# Altium PCB Electrode_Breakout.PcbDoc
Units mil, origin at the board's own origin, x right, y up, seen from the top; angles counter-clockwise.
Board outline 1600 x 1400 mil, 4 copper layers (Top, Ground Plane, Power Plane, Bottom), stack 61.497 mil thick; 7 components, 65 nets, 141 pads, 8 vias.
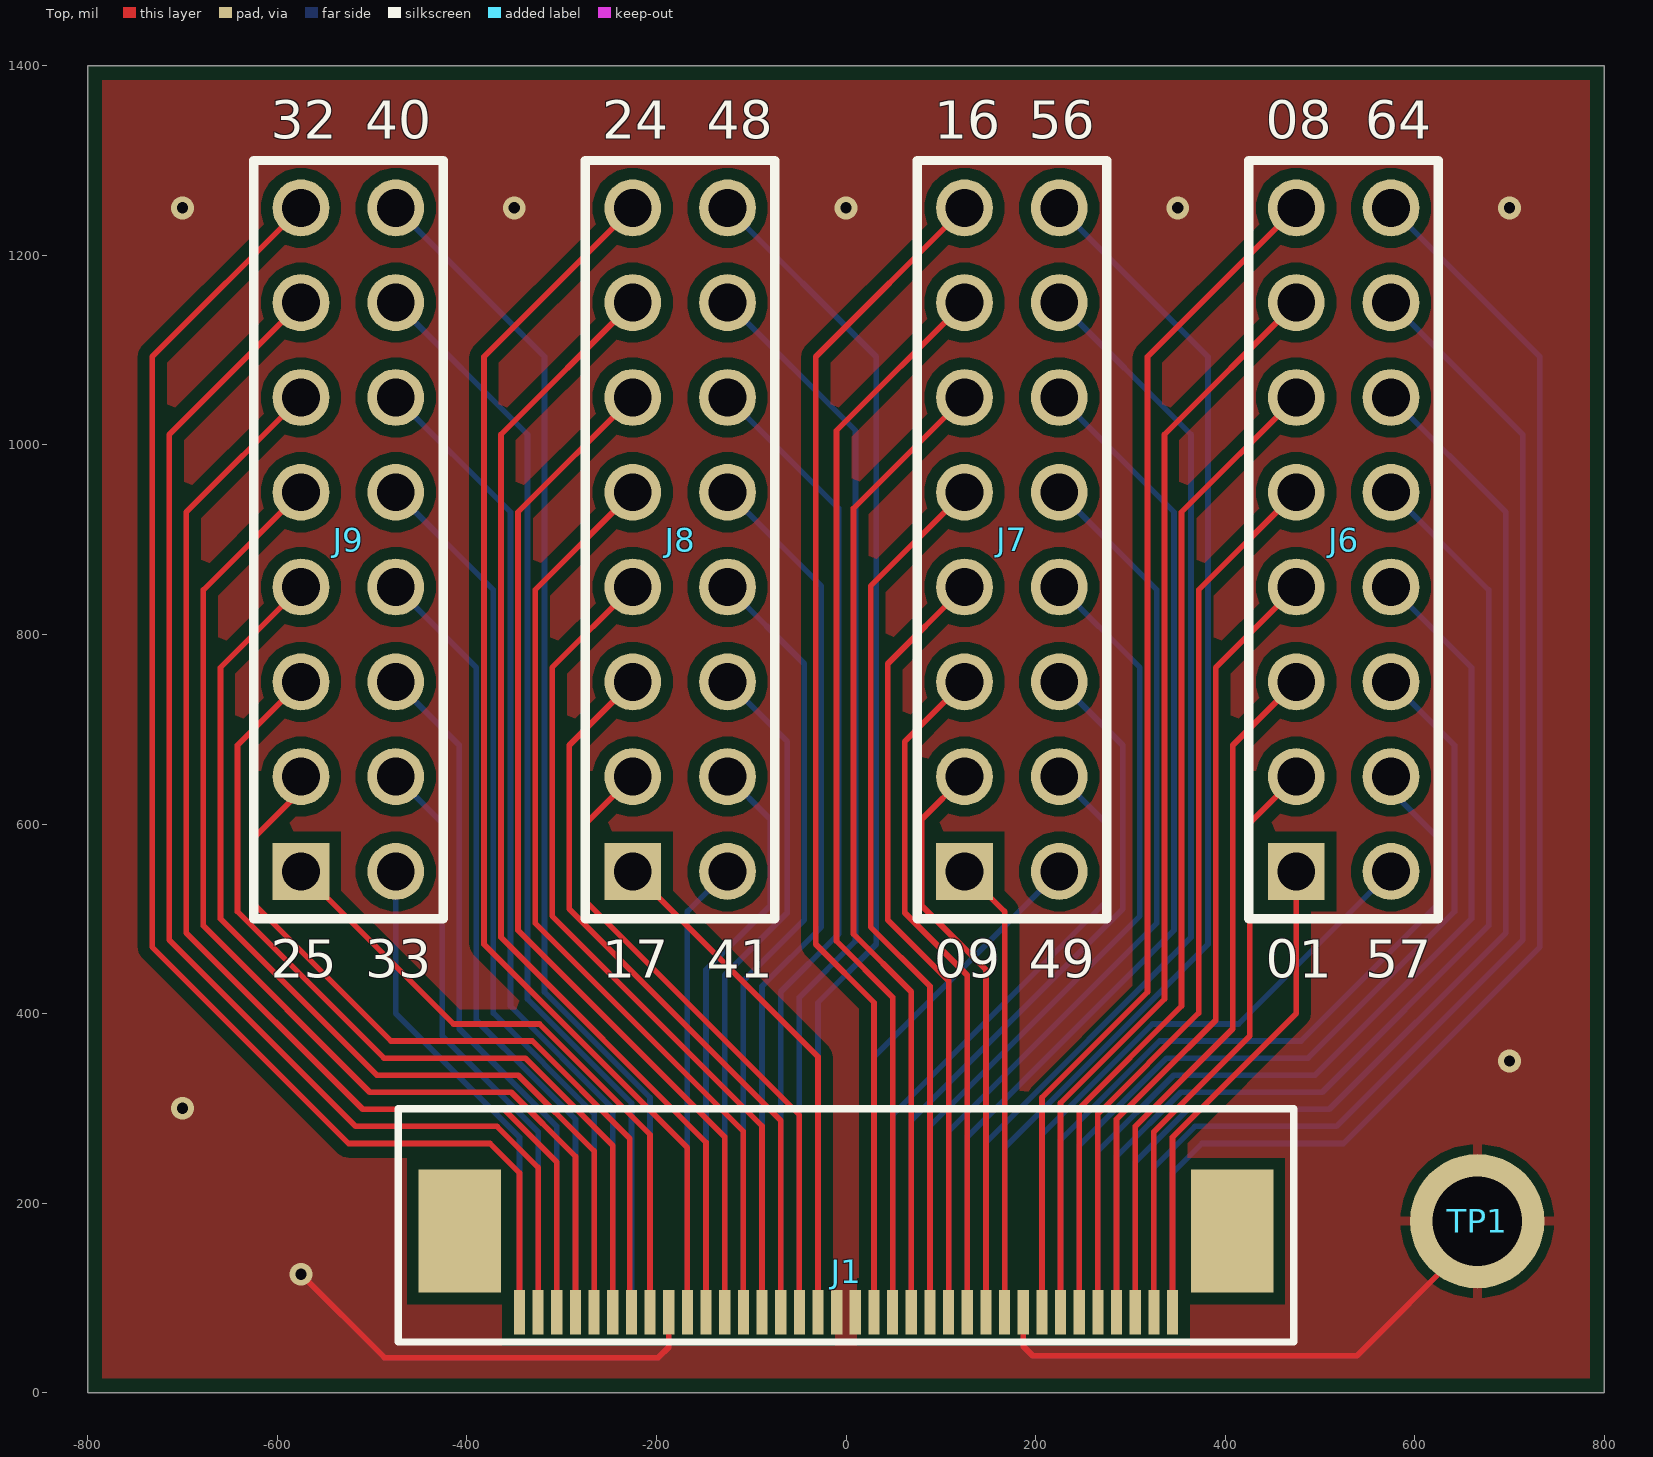
[diagram p0: Top view]
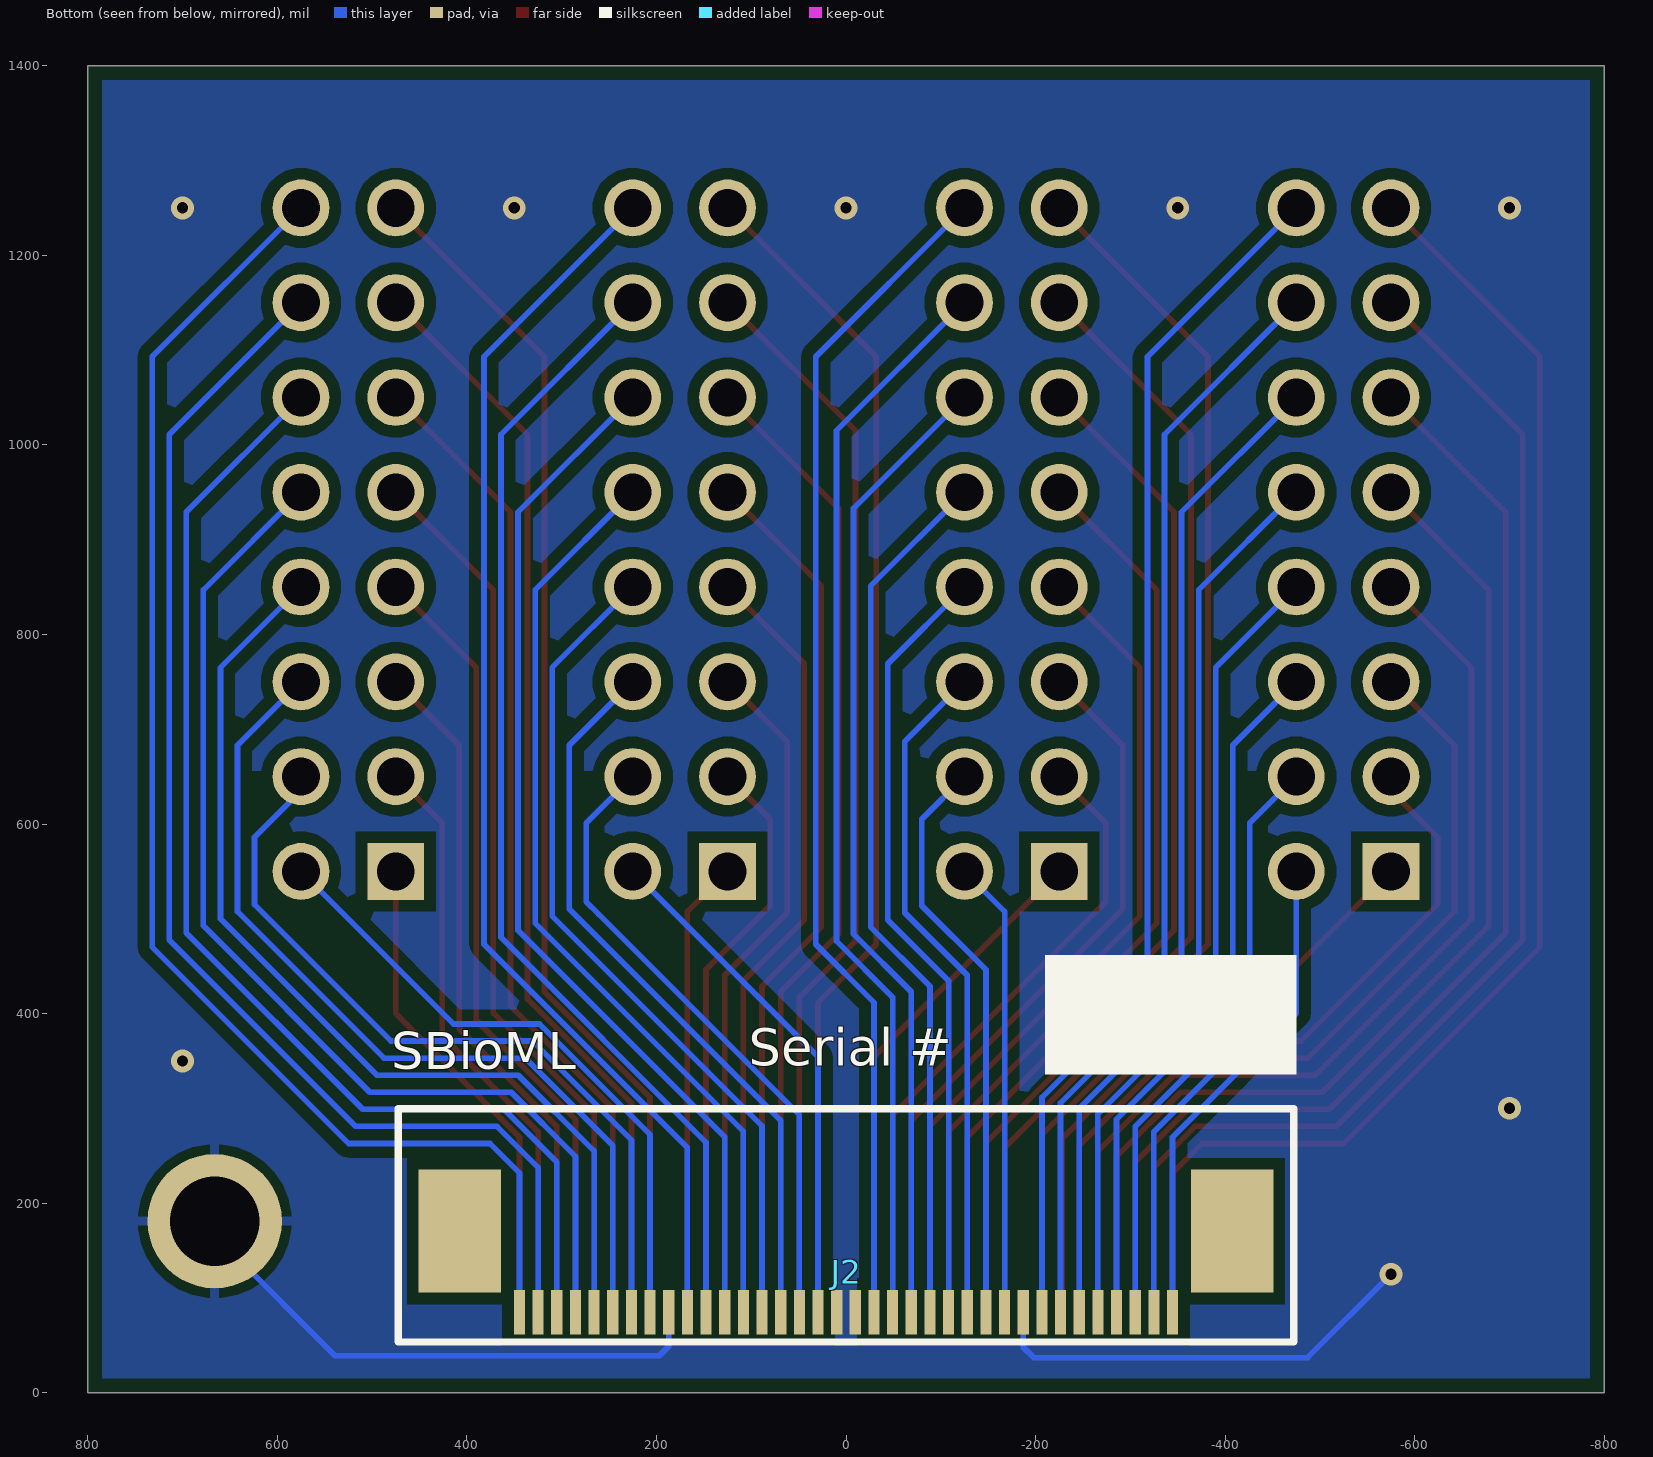
[diagram p1: Bottom view, seen from below]
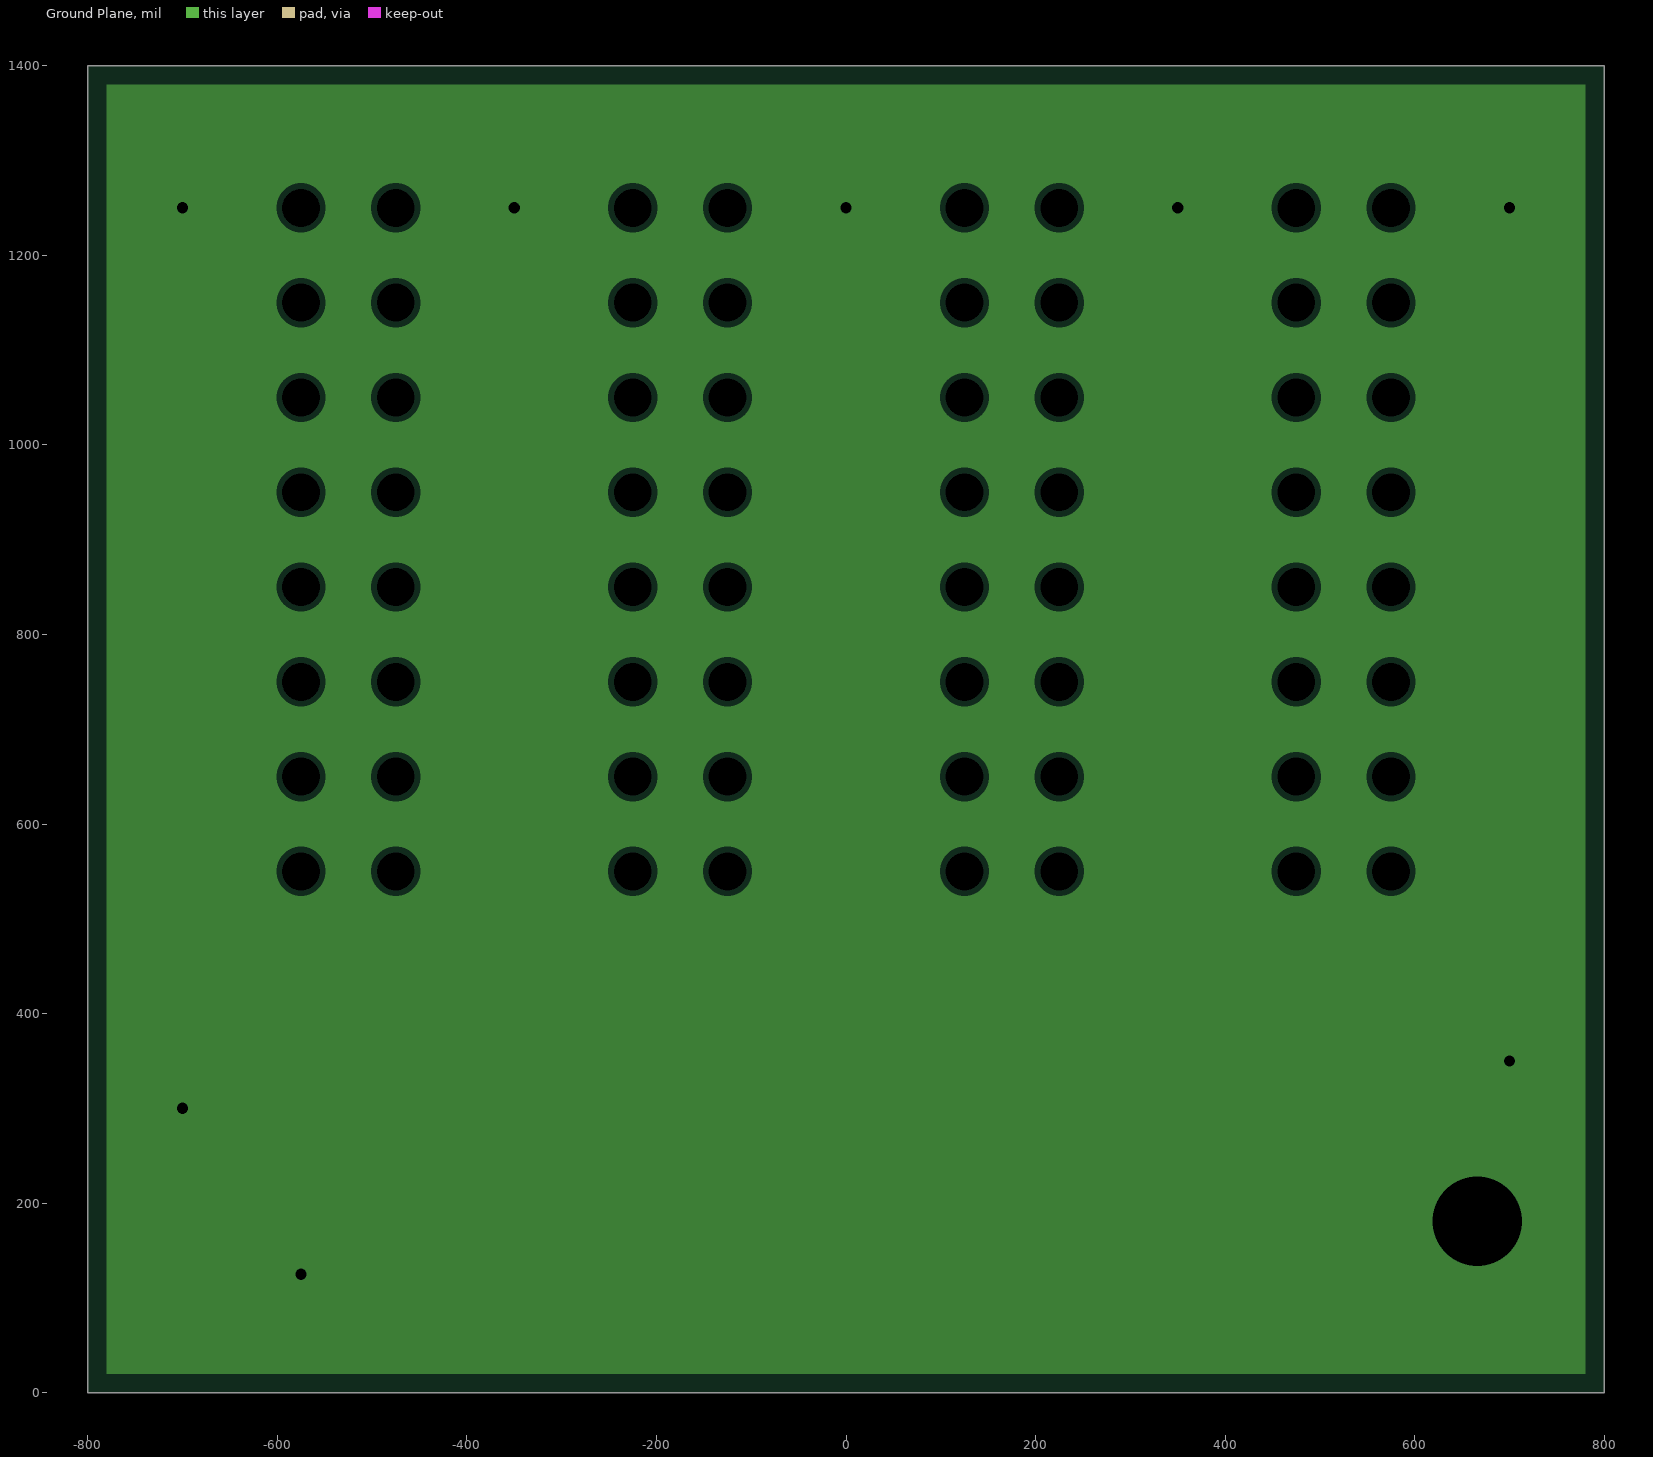
[diagram p2: Ground Plane, clearances drawn from the general rule]
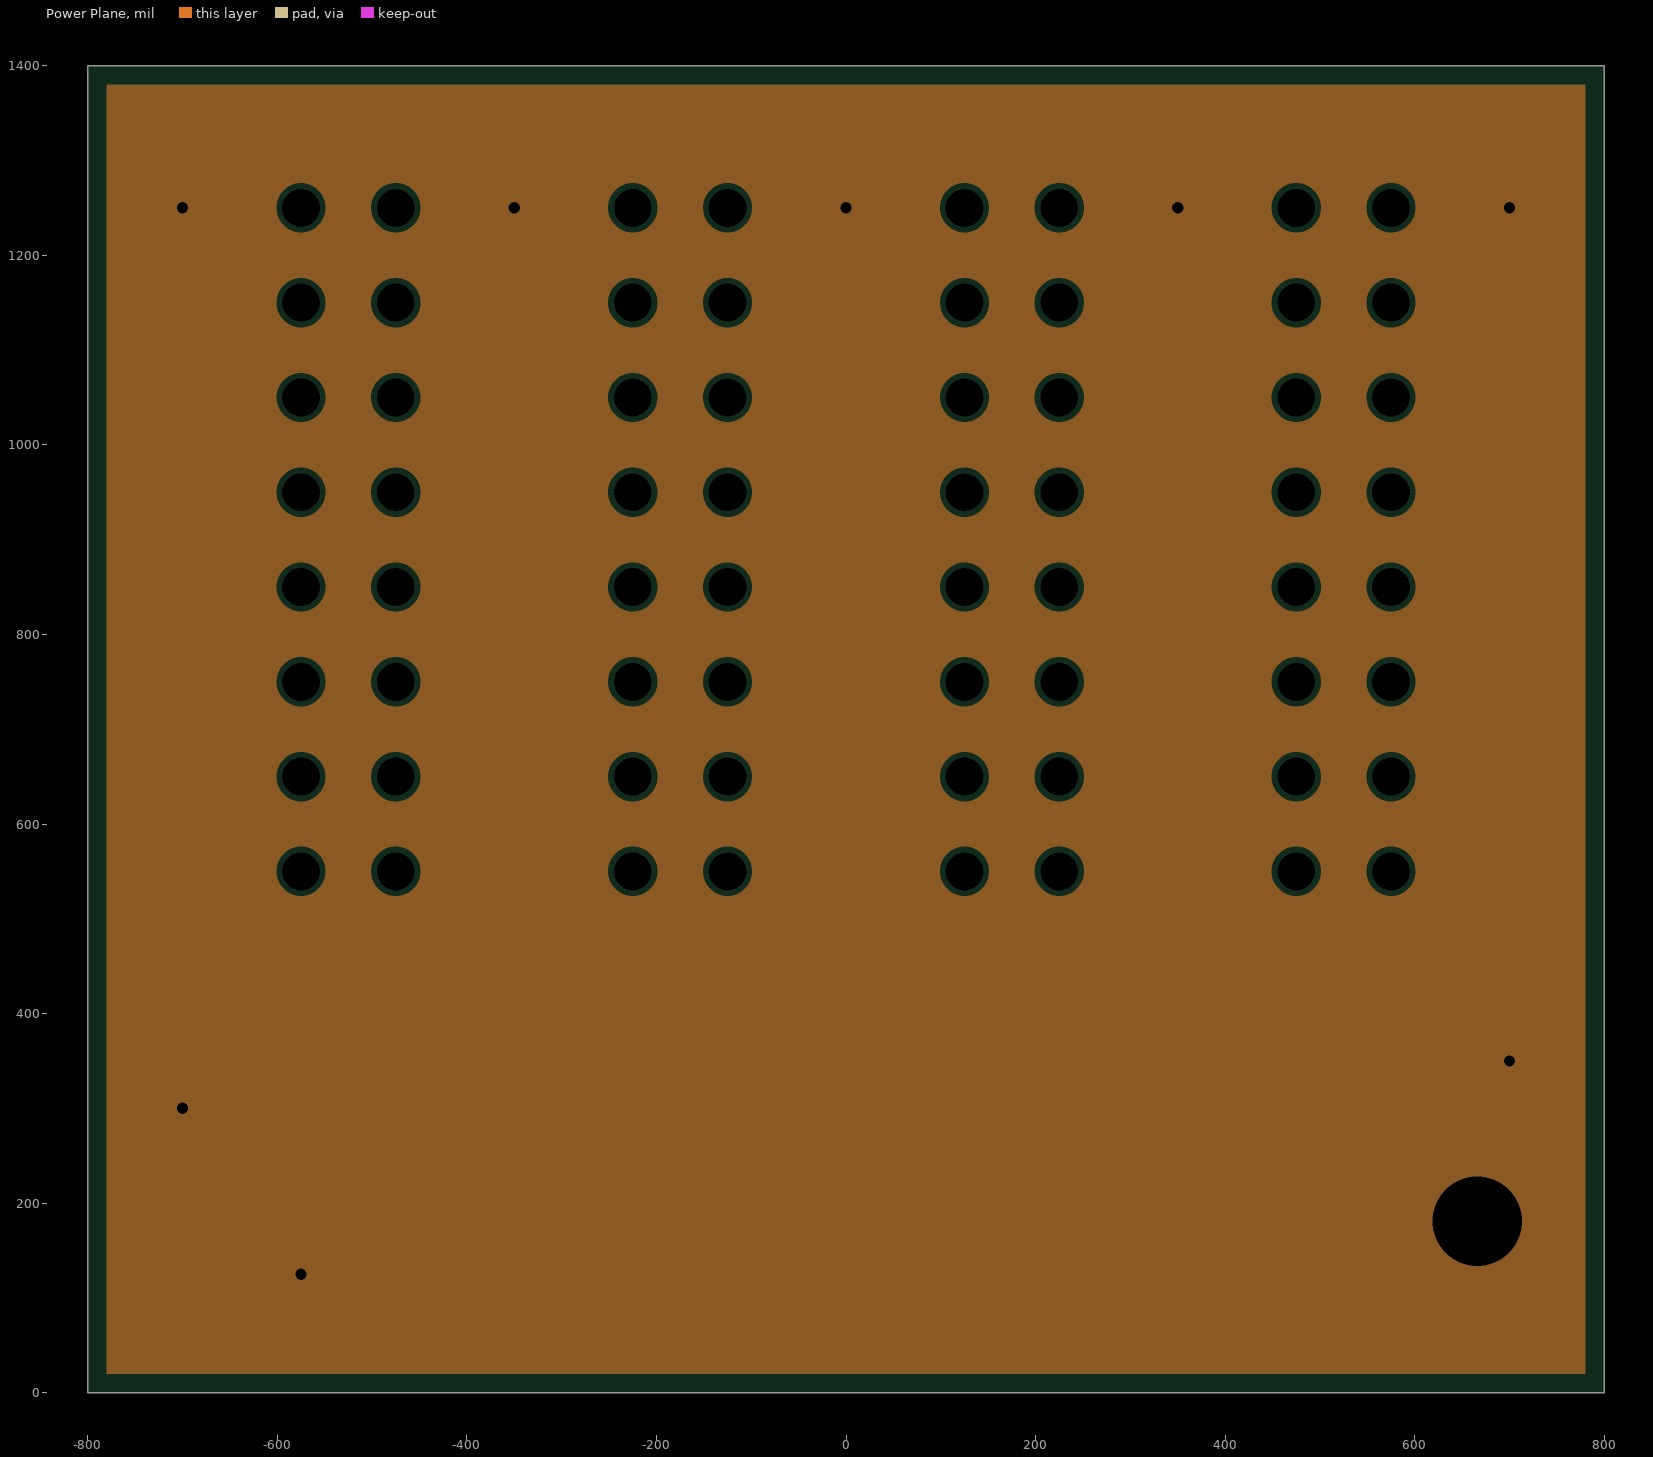
[diagram p3: Power Plane, clearances drawn from the general rule]

## Layer stack, top to bottom
Top Solder: solder mask 0.4, Solder Resist, Dk 3.5
Top: signal copper 1.378
Dielectric 1: prepreg 7.717, FR-4, Dk 4.74
Ground Plane: plane copper 1.378, net REF
Dielectric 3: core 40.551, Dk 4.6
Power Plane: plane copper 1.378, net REF
Dielectric 4: prepreg 7.717, Dk 4.74
Bottom: signal copper 1.378
Bottom Solder: solder mask 0.4, Solder Resist, Dk 3.5

## Board outline
-800,0 -800,1400 800,1400 800,0

## Design rules (kind name [scope] priority, off if disabled: settings)
BoardOutlineClearance [All] p1: gap=15 ignorepadtopadclearanceinfootprint=FALSE
Clearance [All] p1: gap=12 ignorepadtopadclearanceinfootprint=TRUE except(4: SMDPad-SMDPad; 8: Arc-SMDPad Track-SMDPad)
ComponentClearance [All] p1: gap=4 collisioncheckmode=3 verticalgap=4 showdistances=FALSE
HoleSize [All] p1: absolutevalues=TRUE maxlimit=1000 minlimit=4 maxpercent=80.000 minpercent=20.000
HoleToHoleClearance [All] p1: gap=10 allowstackedmicrovias=FALSE
MinimumSolderMaskSliver [All] p1: minsoldermaskwidth=4
PlaneClearance [All] p1: clearance=6
PlaneConnect [All] p1: pad.planeconnectstyle=Relief pad.reliefexpansion=20 pad.reliefentries=4 pad.reliefconductorwidth=10 pad.reliefairgap=10 via.planeconnectstyle=Direct via.reliefexpansion=20 via.reliefentries=4 via.reliefconductorwidth=10 via.reliefairgap=10
PolygonConnect [All] p1: thpad.connectstyle=Relief thpad.reliefconductorwidth=10 thpad.reliefentries=4 thpad.polygonreliefangle="90 Angle" thpad.airgapwidth=10 smdpad.connectstyle=Direct smdpad.reliefconductorwidth=10 smdpad.reliefentries=4 smdpad.polygonreliefangle="90 Angle" smdpad.airgapwidth=10 via.connectstyle=Direct via.reliefconductorwidth=10 via.reliefentries=4 via.polygonreliefangle="90 Angle" via.airgapwidth=10
RoutingVias [All] p1: holewidth=12 width=24 viastyle="Through Hole" minholewidth=12 minwidth=24 maxholewidth=12 maxwidth=24
SilkToSilkClearance [All] p1: silktosilkclearance=4
SilkToSolderMaskClearance [IsPad] p1: minsilkscreentomaskgap=2 clearancetoexposedcopper=FALSE
SolderMaskExpansion [All] p1: expansion=2 istentingtop=FALSE
Width [All] p1: maxlimit=15 minlimit=6 preferedwidth=6 minimp=50.000000 maximp=50.000000 favimp=50.000000
22 further rules are at their usual default settings.

## Components (designator, comment, footprint, x,y, rotation, side; value= is the part's Value field where it differs from the comment)
J1 "3-2492104-6" CON_ZIF_RA_36POS 0,85 r180 top locked
J2 "3-2492104-6" CON_ZIF_RA_36POS 0,85 r0 bottom locked
J6 "CON_HEADER_16" CON_HEADER_16 525,900 r90 top locked
J7 "CON_HEADER_16" CON_HEADER_16 175,900 r90 top locked
J8 "CON_HEADER_16" CON_HEADER_16 -175,900 r90 top locked
J9 "CON_HEADER_16" CON_HEADER_16 -525,900 r90 top locked
TP1 "TP_Small" TP_Small_M2 666,181 r0 top

## Footprints (in the part's own frame and the unit in brackets; to place one, negate y for a bottom-side part, rotate by r counter-clockwise, add the part's x,y. Pads: shape width x height; smd on the part's side, far side on the other; paste and mask are expansions set on the pad)
CON_HEADER_16 [mil] "0.1\" pitch"
  rect 60x60 hole 40: 1(-350,50)
  round 60 hole 40: 2(-250,50) 3(-150,50) 4(-50,50) 5(50,50) 6(150,50) 7(250,50) 8(350,50) 9(350,-50) 10(250,-50) 11(150,-50) 12(50,-50) 13(-50,-50) 14(-150,-50) 15(-250,-50) 16(-350,-50)
  silkscreen extent -400,-100 400,100
CON_ZIF_RA_36POS [mm] "3-2492104-6 / 36 Position FPC Connector Contacts, Bottom 0.020\" (0.50mm) Surface Mount, Right Angle"
  rect 0.3x1.2 smd mask+0.025: 1(-8.75,0) 2(-8.25,0) 3(-7.75,0) 4(-7.25,0) 5(-6.75,0) 6(-6.25,0) 7(-5.75,0) 8(-5.25,0) 9(-4.75,0) 10(-4.25,0) 11(-3.75,0) 12(-3.25,0) 13(-2.75,0) 14(-2.25,0) 15(-1.75,0) 16(-1.25,0) 17(-0.75,0) 18(-0.25,0) 19(0.25,0) 20(0.75,0) 21(1.25,0) 22(1.75,0) 23(2.25,0) 24(2.75,0) 25(3.25,0) 26(3.75,0) 27(4.25,0) 28(4.75,0) 29(5.25,0) 30(5.75,0) 31(6.25,0) 32(6.75,0) 33(7.25,0) 34(7.75,0) 35(8.25,0) 36(8.75,0)
  rect 2.2x3.3 smd mask+0.025: M1(-10.35,-2.17) M2(10.35,-2.17)
  silkscreen extent -12,-5.45 12,0.8
TP_Small_M2 [mm]
  round 3.6 hole 2.4: 1(0,0)

## Part data
J1 J2: library part CON_ZIF_RA_36POS, "36 Position FPC Connector Contacts, Bottom 0.020\" (0.50mm) Surface Mount, Right Angle", GRAMS Lib Spec=2.7

## Via types
v1: diameter 24, hole 12, Top to Bottom, 8 vias

## Nets (pads, with @x,y where several pads share a name; then routed paths per layer and width w, separated by ;. In a path a pad name is that pad's centre, name@x,y a point inside that pad or via, vN(x,y) a via of type N, cw(c..) or ccw(c..) an arc to the next point about the centre after c; other vN are vias at no path point)
INPUT_01: J1.1 J6.1 | length 519.1
  Top w6: J1.1 344.49,269.49 475,400 J6.1
INPUT_02: J1.2 J6.2 | length 627.2
  Top w6: J1.2 324.8,275.26 426,376.46 426,601 J6.2
INPUT_03: J1.3 J6.3 | length 735.4
  Top w6: J1.3 305.12,281.03 408,383.91 408,683 J6.3
INPUT_04: J1.4 J6.4 | length 843.5
  Top w6: J1.4 285.43,288.43 330,333 390,393 390,765 J6.4
INPUT_05: J1.5 J6.5 | length 951.7
  Top w6: J1.5 265.75,294.2 372,400.46 372,847 J6.5
INPUT_06: J1.6 J6.6 | length 1059.8
  Top w6: J1.6 246.06,299.97 354,407.91 354,929 J6.6
INPUT_07: J1.7 J6.7 | length 1168
  Top w6: J1.7 226.38,305.75 336,415.37 336,1011 J6.7
INPUT_08: J1.8 J6.8 | length 1276.1
  Top w6: J1.8 206.69,311.52 318,422.82 318,1093 J6.8
INPUT_09: J1.10 J7.1 | length 482.5
  Top w6: J7.1 167.32,507.68 J1.10
INPUT_10: J1.11 J7.2 | length 611.7
  Top w6: J7.2 80,605 80,513.79 147.64,446.15 J1.11
INPUT_11: J1.12 J7.3 | length 718.4
  Top w6: J7.3 62,687 62,506.33 127.95,440.38 J1.12
INPUT_12: J1.13 J7.4 | length 825.2
  Top w6: J1.13 108.27,434.61 44,498.88 44,769 J7.4
INPUT_13: J1.14 J7.5 | length 931.9
  Top w6: J1.14 88.58,428.84 26,491.42 26,851 J7.5
INPUT_14: J1.15 J7.6 | length 1038.7
  Top w6: J1.15 68.9,423.07 8,483.96 8,933 J7.6
INPUT_15: J1.16 J7.7 | length 1145.4
  Top w6: J1.16 49.21,256.17 49.21,417.3 -10,476.51 -10,1015 J7.7
INPUT_16: J1.17 J7.8 | length 1255.5
  Top w6: J1.17 29.53,411.52 -32,473.05 -32,487 -32,1093 J7.8
INPUT_17: J1.20 J8.1 | length 546
  Top w6: J8.1 -29.53,354.53 J1.20
INPUT_18: J1.21 J8.2 | length 678.4
  Top w6: J8.2 -274,601 -274,527.73 -274,517.79 -261.21,505 -49.21,293 J1.21
INPUT_19: J1.22 J8.3 | length 785.2
  Top w6: J8.3 -292,683 -292,510.33 -68.9,287.23 J1.22
INPUT_20: J1.23 J8.4 | length 891.9
  Top w6: J8.4 -310,765 -310,502.88 -88.58,281.46 J1.23
INPUT_21: J1.24 J8.5 | length 998.7
  Top w6: J8.5 -328,847 -328,495.42 -108.27,275.69 J1.24
INPUT_22: J1.25 J8.6 | length 1105.4
  Top w6: J8.6 -346,929 -346,487.96 -127.95,269.92 J1.25
INPUT_23: J1.26 J8.7 | length 1212.2
  Top w6: J8.7 -364,1011 -364,480.51 -147.64,264.15 J1.26
INPUT_24: J1.27 J8.8 | length 1319
  Top w6: J8.8 -382,1093 -382,473.05 -167.32,258.37 J1.27
INPUT_25: J1.29 J9.1 | length 670.6
  Top w6: J9.1 -414,389 -323.4,389 -206.69,272.29 J1.29
INPUT_26: J1.30 J9.2 | length 837.4
  Top w6: J9.2 -575,635.07 -624,586.07 -624,514.99 -480.01,371 -330.86,371 -228.06,268.2 -228.06,86.69 J1.30
INPUT_27: J1.31 J9.3 | length 944.1
  Top w6: J9.3 -642,683 -642,570.26 -642,507.53 -487.47,353 -338.32,353 -246.06,260.75 J1.31
INPUT_28: J1.32 J9.4 | length 1050.9
  Top w6: J9.4 -660,765 -660,562.81 -660,500.07 -494.93,335 -345.77,335 -265.75,254.98 J1.32
INPUT_29: J1.33 J9.5 | length 1157.6
  Top w6: J9.5 -678,847 -678,555.35 -678,492.62 -502.38,317 -353.23,317 -285.43,249.21 J1.33
INPUT_30: J1.34 J9.6 | length 1264.4
  Top w6: J9.6 -696,929 -696,547.9 -696,485.16 -509.84,299 -360.68,299 -305.12,243.44 J1.34
INPUT_31: J1.35 J9.7 | length 1371.2
  Top w6: J9.7 -714,1011 -714,532.99 -714,477.71 -517.29,281 -368.14,281 -324.8,237.66 J1.35
INPUT_32: J1.36 J9.8 | length 1477.9
  Top w6: J9.8 -732,1093 -732,470.25 -524.75,263 -439.28,263 -375.59,263 -344.49,231.89 J1.36
INPUT_33: J2.1 J9.16 | length 519.1
  Bottom w6: J9.16 -475,400 -344.49,269.49 J2.1
INPUT_34: J2.2 J9.15 | length 627.2
  Bottom w6: J9.15 -426,601 -426,376.46 -324.8,275.26 J2.2
INPUT_35: J2.3 J9.14 | length 735.4
  Bottom w6: J9.14 -408,683 -408,383.91 -305.12,281.03 J2.3
INPUT_36: J2.4 J9.13 | length 843.5
  Bottom w6: J9.13 -390,765 -390,393 -330,333 -285.43,288.43 J2.4
INPUT_37: J2.5 J9.12 | length 951.7
  Bottom w6: J9.12 -372,847 -372,400.46 -265.75,294.2 J2.5
INPUT_38: J2.6 J9.11 | length 1059.8
  Bottom w6: J9.11 -354,929 -354,407.91 -246.06,299.97 J2.6
INPUT_39: J2.7 J9.10 | length 1168
  Bottom w6: J9.10 -336,1011 -336,415.37 -226.38,305.75 J2.7
INPUT_40: J2.8 J9.9 | length 1276.1
  Bottom w6: J9.9 -318,1093 -318,422.82 -206.69,311.52 J2.8
INPUT_41: J2.10 J8.16 | length 482.5
  Bottom w6: J2.10 -167.32,507.68 J8.16
INPUT_42: J2.11 J8.15 | length 611.7
  Bottom w6: J2.11 -147.64,446.15 -80,513.79 -80,605 J8.15
INPUT_43: J2.12 J8.14 | length 718.4
  Bottom w6: J2.12 -127.95,440.38 -62,506.33 -62,687 J8.14
INPUT_44: J2.13 J8.13 | length 825.2
  Bottom w6: J8.13 -44,769 -44,498.88 -108.27,434.61 J2.13
INPUT_45: J2.14 J8.12 | length 931.9
  Bottom w6: J8.12 -26,851 -26,491.42 -88.58,428.84 J2.14
INPUT_46: J2.15 J8.11 | length 1038.7
  Bottom w6: J8.11 -8,933 -8,483.96 -68.9,423.07 J2.15
INPUT_47: J2.16 J8.10 | length 1145.4
  Bottom w6: J8.10 10,1015 10,476.51 -49.21,417.3 -49.21,256.17 J2.16
INPUT_48: J2.17 J8.9 | length 1255.5
  Bottom w6: J8.9 32,1093 32,487 32,473.05 -29.53,411.52 J2.17
INPUT_49: J2.20 J7.16 | length 546
  Bottom w6: J2.20 29.53,354.53 J7.16
INPUT_50: J2.21 J7.15 | length 678.4
  Bottom w6: J2.21 49.21,293 261.21,505 274,517.79 274,527.73 274,601 J7.15
INPUT_51: J2.22 J7.14 | length 785.2
  Bottom w6: J2.22 68.9,287.23 292,510.33 292,683 J7.14
INPUT_52: J2.23 J7.13 | length 891.9
  Bottom w6: J2.23 88.58,281.46 310,502.88 310,765 J7.13
INPUT_53: J2.24 J7.12 | length 998.7
  Bottom w6: J2.24 108.27,275.69 328,495.42 328,847 J7.12
INPUT_54: J2.25 J7.11 | length 1105.4
  Bottom w6: J2.25 127.95,269.92 346,487.96 346,929 J7.11
INPUT_55: J2.26 J7.10 | length 1212.2
  Bottom w6: J2.26 147.64,264.15 364,480.51 364,1011 J7.10
INPUT_56: J2.27 J7.9 | length 1319
  Bottom w6: J2.27 167.32,258.37 382,473.05 382,1093 J7.9
INPUT_57: J2.29 J6.16 | length 670.6
  Bottom w6: J2.29 206.69,272.29 323.4,389 414,389 J6.16
INPUT_58: J2.30 J6.15 | length 837.4
  Bottom w6: J2.30 226.38,266.52 330.86,371 480.01,371 624,514.99 624,586.07 575,635.07 J6.15
INPUT_59: J2.31 J6.14 | length 944.1
  Bottom w6: J2.31 246.06,260.75 338.32,353 487.47,353 642,507.53 642,570.26 642,683 J6.14
INPUT_60: J2.32 J6.13 | length 1050.9
  Bottom w6: J2.32 265.75,254.98 345.77,335 494.93,335 660,500.07 660,562.81 660,765 J6.13
INPUT_61: J2.33 J6.12 | length 1157.6
  Bottom w6: J2.33 285.43,249.21 353.23,317 502.38,317 678,492.62 678,555.35 678,847 J6.12
INPUT_62: J2.34 J6.11 | length 1264.4
  Bottom w6: J2.34 305.12,243.44 360.68,299 509.84,299 696,485.16 696,547.9 696,929 J6.11
INPUT_63: J2.35 J6.10 | length 1371.2
  Bottom w6: J2.35 324.8,237.66 368.14,281 517.29,281 714,477.71 714,532.99 714,1011 J6.10
INPUT_64: J2.36 J6.9 | length 1477.9
  Bottom w6: J2.36 344.49,231.89 375.59,263 439.28,263 524.75,263 732,470.25 732,1093 J6.9
REF: J1.9 J1.18 J1.19 J1.28 J2.9 J2.18 J2.19 J2.28 TP1.1 | length 2030.2
  Top w6: v1(-575,125) -487,37 -198,37 -187.01,47.99 J1.28 ; J1.9 187.01,48.99 197,39 539,39 TP1.1@650,150
  Bottom w6: v1(-575,125) -487,37 -198,37 -187.01,47.99 J2.9 ; J2.28 187.01,48.99 197,39 539,39 TP1.1@650,150
  other v1: -700,300 700,350 -700,1250 -350,1250 0,1250 350,1250 700,1250
pads on no net: J1.M1 J1.M2 J2.M1 J2.M2

## Polygon pours and split planes (outlines as drawn)
REF on Bottom "REF_BOT" (solid, remove dead copper, pour order 1): -800,0 -800,1400 800,1400 800,0
REF on Top "REF_TOP" (solid, remove dead copper, pour order 0): -800,0 -800,1400 800,1400 800,0
REF on Power Plane (split plane): 779.9,20.1 -779.9,20.1 -779.9,1379.9 779.9,1379.9
REF on Ground Plane (split plane): 779.9,20.1 -779.9,20.1 -779.9,1379.9 779.9,1379.9

## Silkscreen, mask and mechanical layers (free items; w line width, h text height)
Top Overlay:
  text "32" at -607,1323 h40
  text "40" at -507,1323 h40
  text "24" at -257,1323 h40
  text "48" at -147,1323 h40
  text "16" at 93,1323 h40
  text "56" at 193,1323 h40
  text "08" at 443,1323 h40
  text "64" at 548,1323 h40
  text "25" at -607,438 h40
  text "33" at -507,438 h40
  text "17" at -257,438 h40
  text "41" at -147,438 h40
  text "09" at 93,438 h40
  text "49" at 193,438 h40
  text "01" at 443,438 h40
  text "57" at 548,438 h40
Bottom Overlay:
  rectangle: -475.47,335.75 -210.15,461.75
  text "Serial #" at 102.54,345 h39.37
  text "SBioML" at 479.54,341.52 h39.37
Board Outline:
  the board outline again, w10